# Altium PCB 175-00029 rev4, 486 CCD Interface.PcbDoc (part 1 of 2)
Units mil, origin at the board's own origin, x right, y up, seen from the top; angles counter-clockwise.
Board outline 2440.95 x 2610.24 mil, 4 copper layers (Top Layer (*.GTL), Internal Plane 1 (*.GP1), Mid-Layer 1  (*.G1), Bottom Layer (*.GBL)), stack 62.6 mil thick; 56 components, 48 nets, 263 pads, 206 vias.
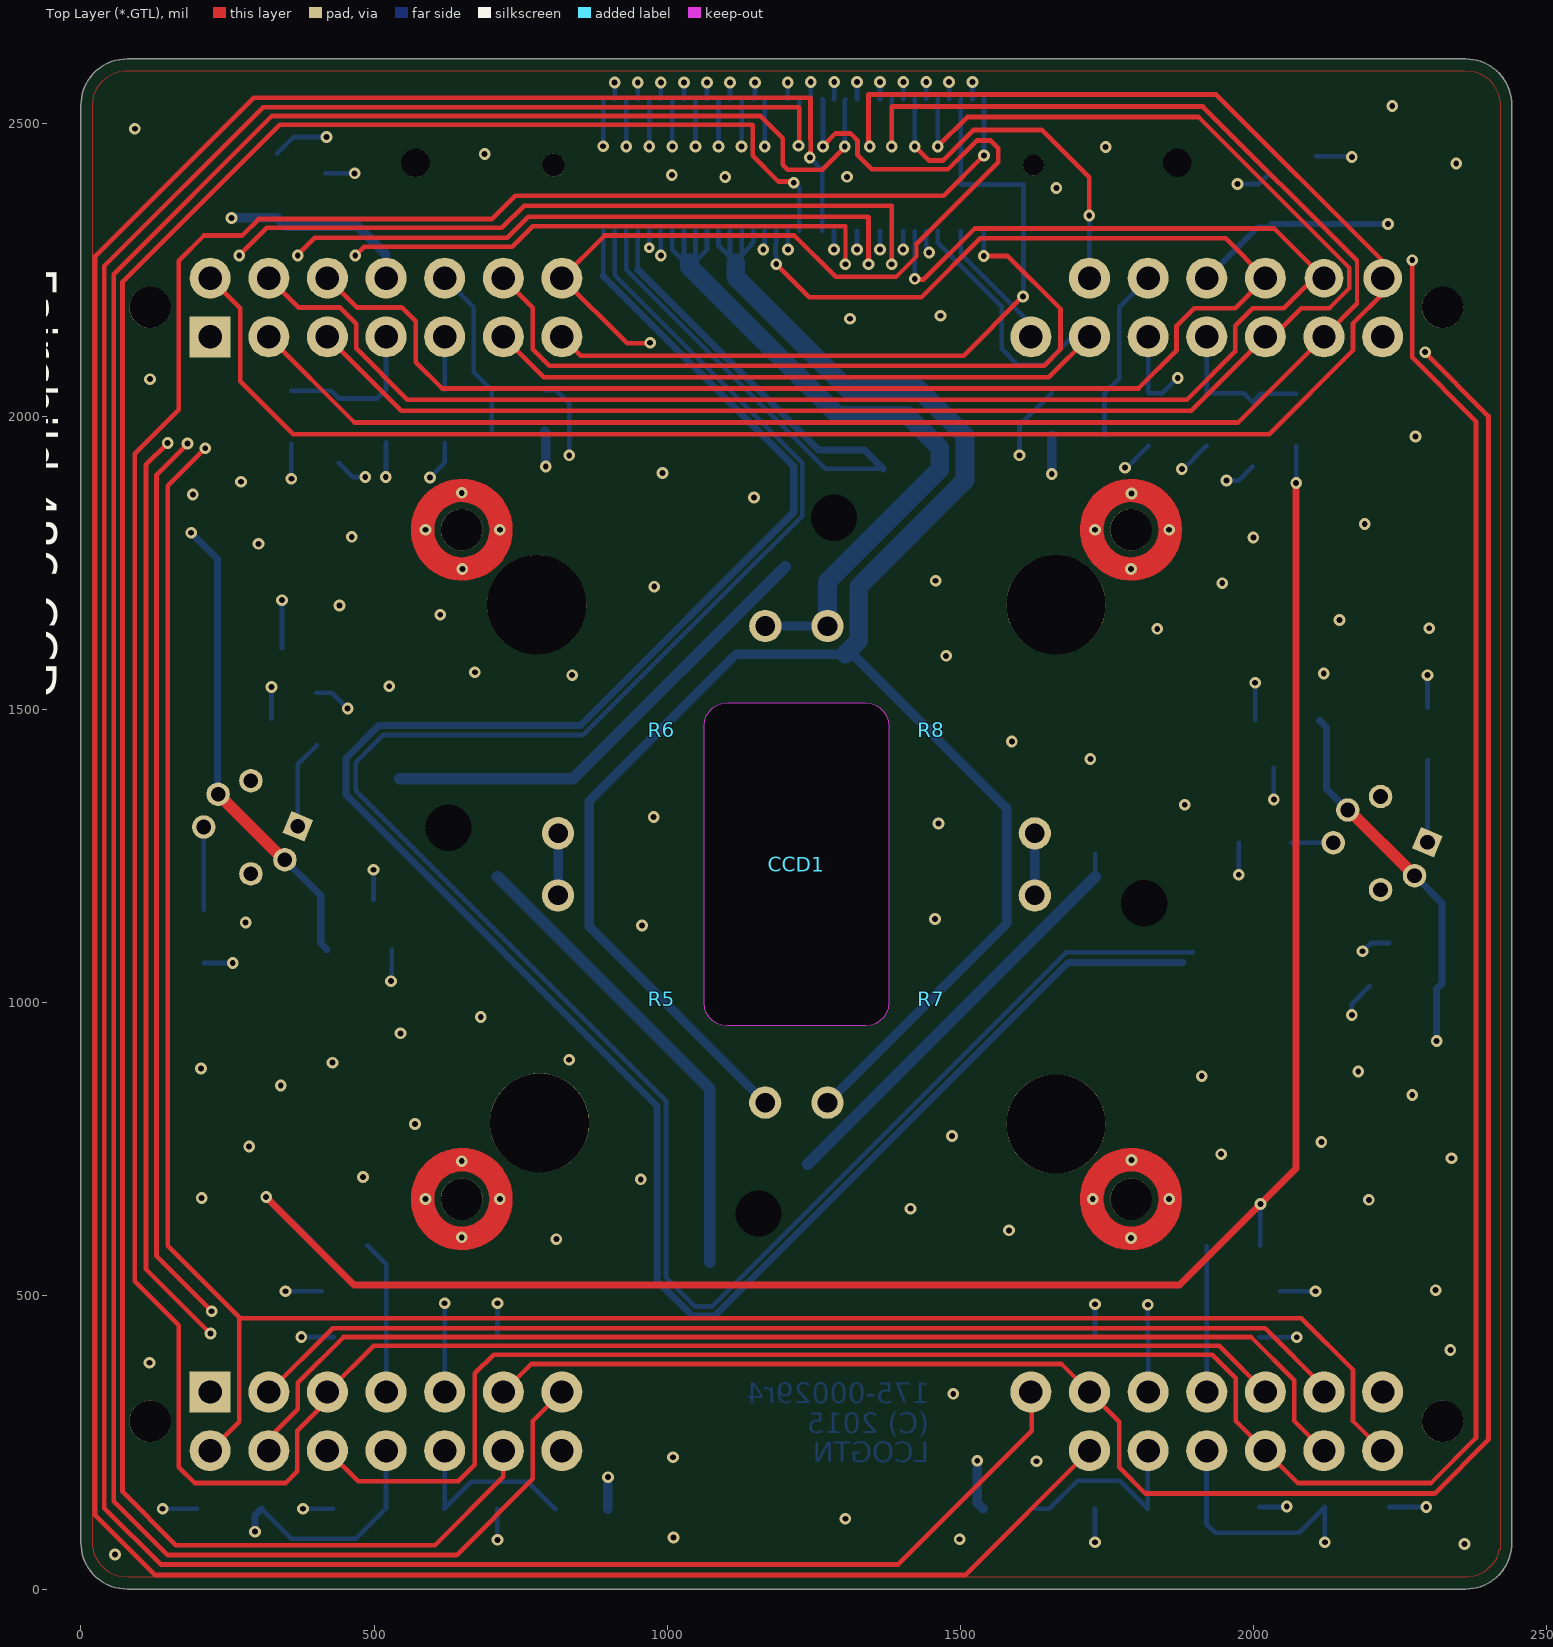
[diagram p0: Top Layer (*.GTL) view]
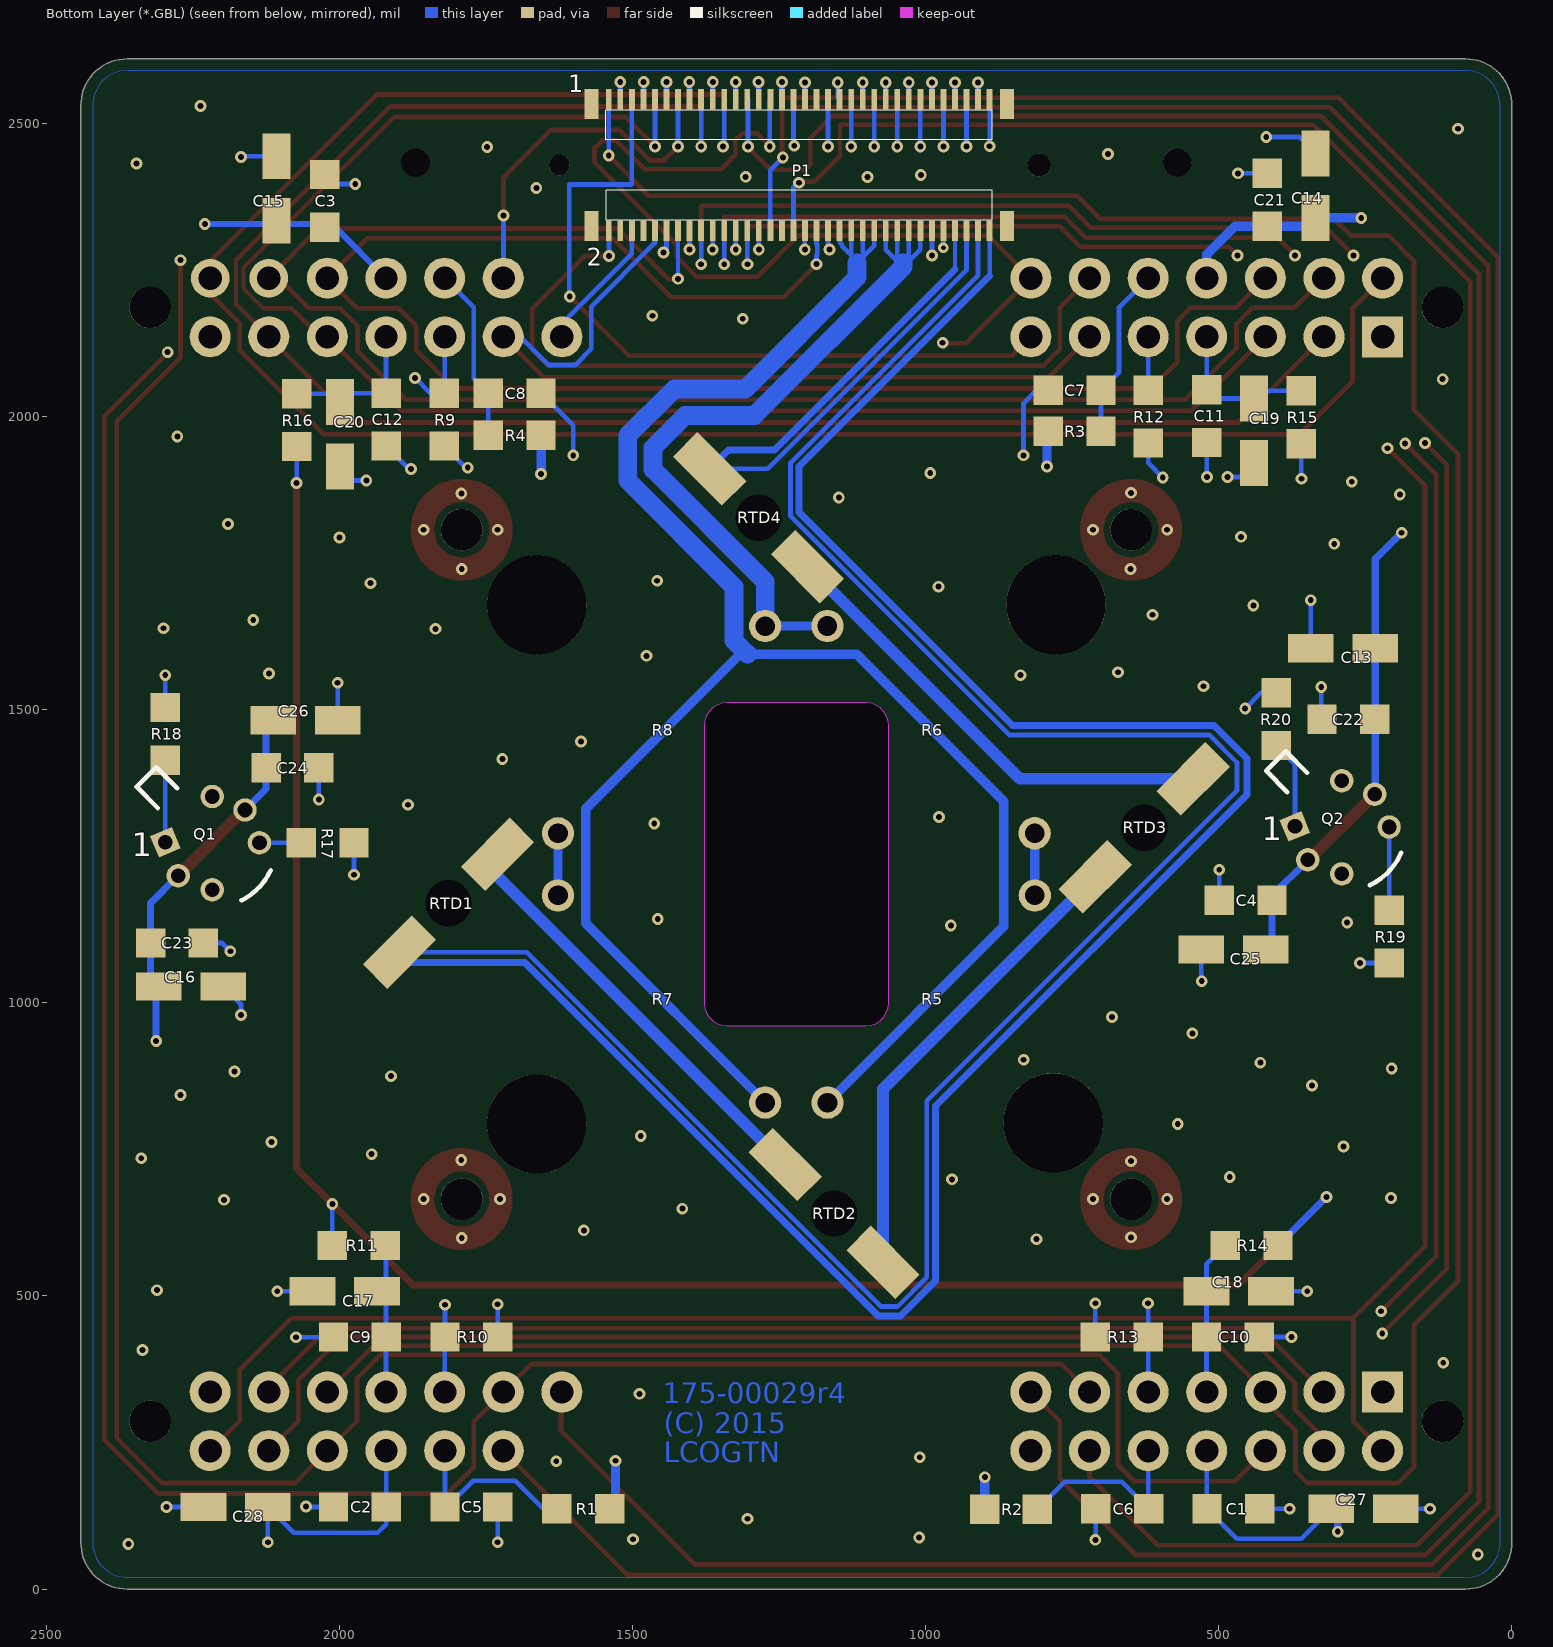
[diagram p1: Bottom Layer (*.GBL) view, seen from below]
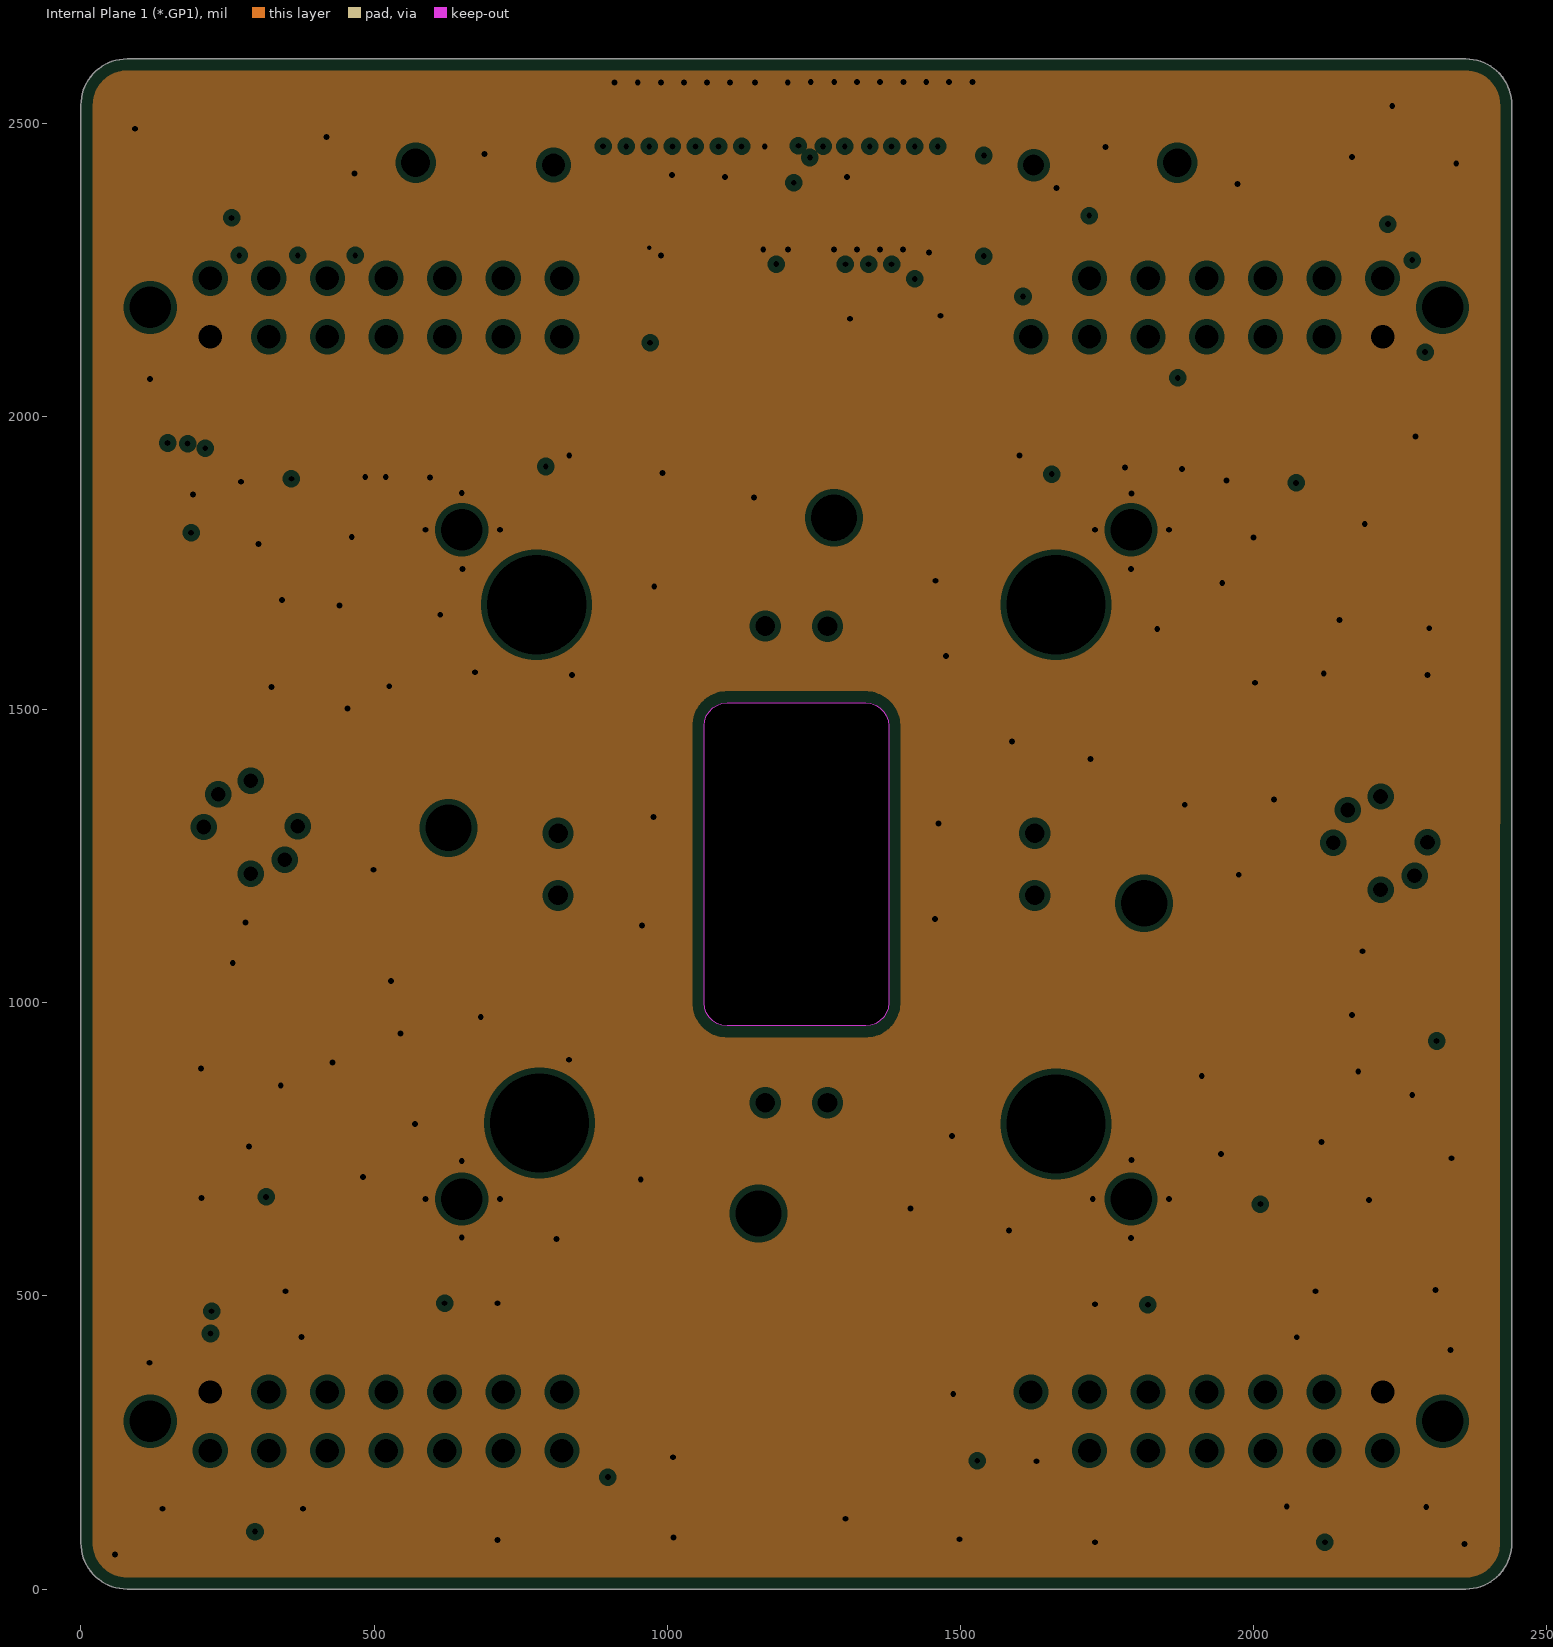
[diagram p2: Internal Plane 1 (*.GP1), clearances drawn from the general rule]
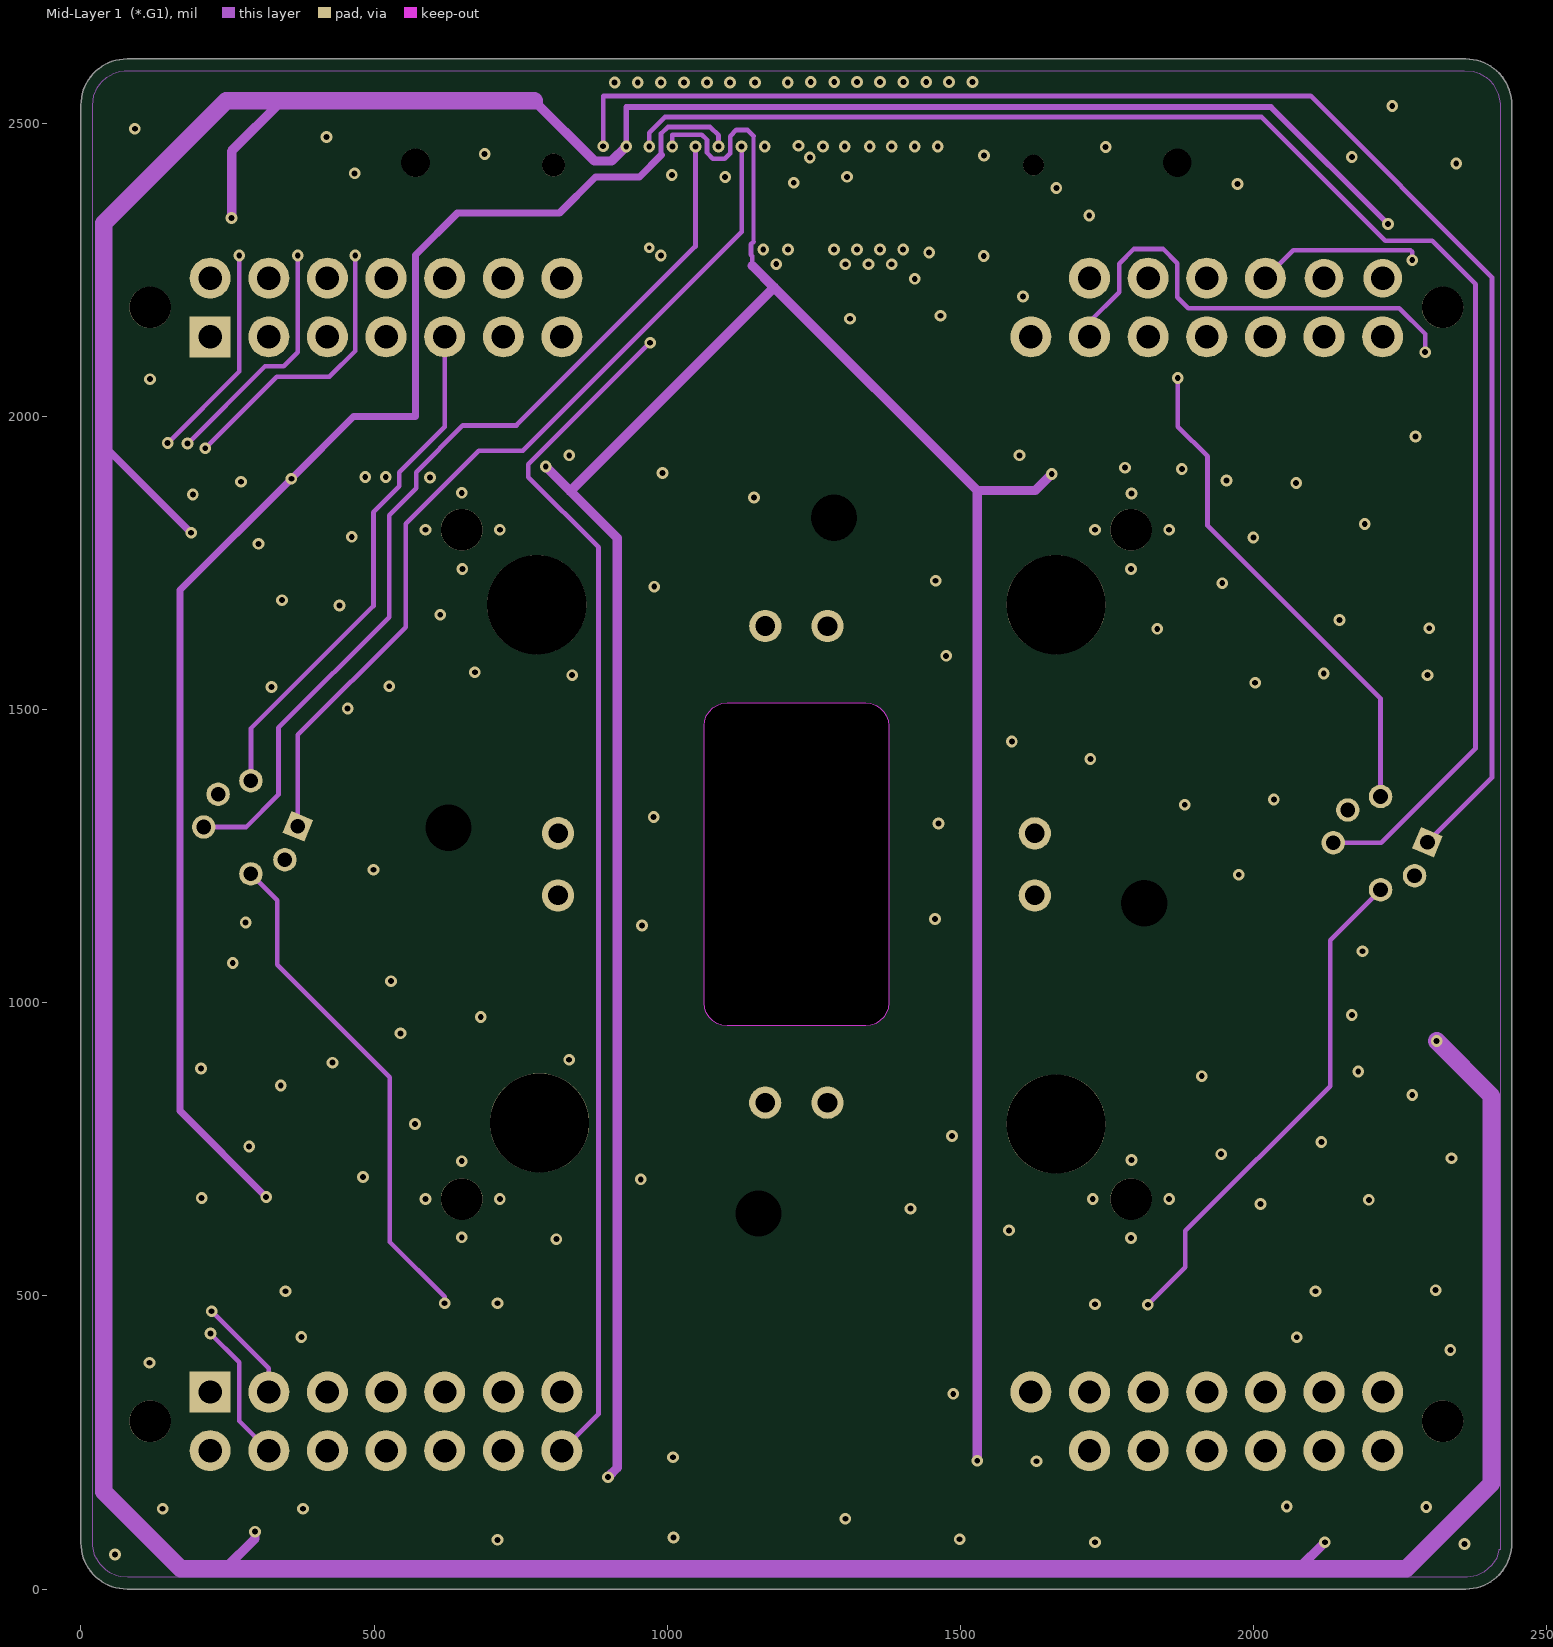
[diagram p3: Mid-Layer 1  (*.G1)]

## Layer stack, top to bottom
Top Layer (*.GTL): signal copper 1.4
Dielectric1: core 19, Polyimide, Dk 3.6
Internal Plane 1 (*.GP1): plane copper 1.4, net AGND
Dielectric2: prepreg 19, Polyimide, Dk 3.6
Mid-Layer 1  (*.G1): signal copper 1.4
Dielectric5: core 19, Polyimide, Dk 3.6
Bottom Layer (*.GBL): signal copper 1.4

## Board outline
0,78.74 ccw(c78.74,78.74) 78.74,0 2362.2,0 ccw(c2362.2,78.74) 2440.95,78.74 2440.94,78.74 2440.94,2531.5 ccw(c2362.2,2531.5) 2362.2,2610.24 78.74,2610.24 ccw(c78.74,2531.5) 0,2531.5
cut-out: 1102.28,1511.81 1338.5,1511.81 1347.26,1510.82 1355.59,1507.91 1363.05,1503.22 1369.28,1496.99 1373.98,1489.52 1376.89,1481.2 1377.87,1472.44 1377.87,1000 1376.89,991.24 1373.98,982.92 1369.28,975.45 1363.05,969.22 1355.59,964.53 1347.26,961.62 1338.5,960.63 1102.28,960.63 1093.52,961.62 1085.2,964.53 1077.74,969.22 1071.5,975.45 1066.81,982.92 1063.9,991.24 1062.91,1000 1062.91,1472.44 1063.9,1481.2 1066.81,1489.52 1071.5,1496.99 1077.74,1503.22 1085.2,1507.91 1093.52,1510.82

## Design rules (kind name [scope] priority, off if disabled: settings)
Clearance Clearance_14 [InNamedPolygon('TopGroundPour')] p1: gap=10
Clearance Clearance_13 [InNamedPolygon('TopGroundPour')] p2: gap=10
Clearance Clearance_12 [InNamedPolygon('TopGroundPour')] p3: gap=10
Clearance Clearance_11 [InNamedPolygon('TopGroundPour')] p4: gap=10
Clearance Clearance_10 [InNamedPolygon('TopGroundPour')] p5: gap=15
Clearance Clearance_9 [InNamedPolygon('Mid1GroundPour')] p6: gap=10
Clearance Clearance_8 [InNamedPolygon('Mid1GroundPour')] p7: gap=20
Clearance Clearance_7 [InNamedPolygon('Mid1GroundPour')] p8: gap=5
Clearance Clearance_6 [InNamedPolygon('Mid1GroundPour')] p9: gap=50
Clearance Clearance_5 [InNamedPolygon('Mid1GroundPour')] p10: gap=10
Clearance Clearance_4 [InNamedPolygon('Mid1GroundPour')] p11: gap=10
Clearance Clearance_3 [InNamedPolygon('Mid1GroundPour')] p12: gap=10
Clearance Clearance_2 [InNamedPolygon('BottomGroundPour')] p13: gap=10
Clearance Clearance_1 [InNamedPolygon('TopGroundPour')] p14: gap=10 except(20: Track-Fill)
Clearance "MSOP pad spacing" [(HasFootprint('TQFP48_m') or HasFootprint('RM-8'))] p15: gap=6
Clearance [All] p16: gap=7
ComponentClearance [(HasFootprint('AXIAL-0.5'))] p1: gap=-1000 collisioncheckmode=3 verticalgap=-1000 showdistances=TRUE
ComponentClearance "CCD Clearance" [(InComponent('CCD1')) vs (HasFootprint('AXIAL-0.5') OR HasFootprint('RTD 1x15mm'))] p2: gap=-39.37 collisioncheckmode=3 verticalgap=-1000 showdistances=FALSE
HoleSize [All] p1: absolutevalues=TRUE maxlimit=300 minlimit=1 maxpercent=80.000 minpercent=20.000
HoleSize Testpoint [All] p2: absolutevalues=TRUE maxlimit=100 minlimit=1 maxpercent=80.000 minpercent=20.000
HoleSize TestPointUsage [All] p3: absolutevalues=TRUE maxlimit=100 minlimit=1 maxpercent=80.000 minpercent=20.000
MinimumSolderMaskSliver [All] p1: minsoldermaskwidth=1
PlaneClearance [All] p1: clearance=10
PlaneConnect [(HasFootprint('Fairchild 486'))] p1: planeconnectstyle=Relief reliefexpansion=20 reliefentries=4 reliefconductorwidth=10 reliefairgap=10
PlaneConnect NoThermalVias [InNet('AGND')] p2: planeconnectstyle=Direct reliefexpansion=20 reliefentries=4 reliefconductorwidth=10 reliefairgap=10
PolygonConnect [All] p1: connectstyle=Relief reliefconductorwidth=10 reliefentries=4 polygonreliefangle="90 Angle" airgapwidth=10
RoutingVias [All] p1: holewidth=10 width=24 viastyle="Through Hole" minholewidth=10 minwidth=20 maxholewidth=25 maxwidth=50
RoutingVias "Dig 5V/Gnd via" [(InNet('+5') OR InNet('D'))] p2: holewidth=28 width=50 viastyle="Through Hole" minholewidth=28 minwidth=50 maxholewidth=28 maxwidth=50
SilkToSolderMaskClearance SilkscreenOverComponentPads [IsPad] p1: minsilkscreentomaskgap=3 clearancetoexposedcopper=TRUE
SolderMaskExpansion [All] p1: expansion=2
UnpouredPolygon [All] p1: allowunpoured=FALSE
Width Width_1 [All] p1: maxlimit=50 minlimit=5 preferedwidth=8
Width [All] p2: maxlimit=50 minlimit=5 preferedwidth=10
Width "+5V/DGND trace" [(InNet('+5') OR InNet('D'))] p3: maxlimit=50 minlimit=10 preferedwidth=50 midlayer1_minwidth=50 bottomlayer_minwidth=50 minimp=50.000000 maximp=50.000000 favimp=50.000000
23 further rules are at their usual default settings.

## Components (designator, comment, footprint, x,y, rotation, side; value= is the part's Value field where it differs from the comment)
C1 "Cap SMD" SMD_0805#1 475,137 r0 bottom
C2 "Cap SMD" SMD_0805#1 1965,140 r180 bottom
C3 "Cap SMD" SMD_0805#1 2025,2368 r270 bottom
C4 "Cap SMD" SMD_0805#1 454.15,1175 r180 bottom
C5 "Cap SMD" SMD_0805#1 1775,140 r0 bottom
C6 "Cap SMD" SMD_0805#2 665,137 r180 bottom
C7 "Cap SMD" SMD_0805#1 746,2045 r180 bottom
C8 "Cap SMD" SMD_0805#1 1701,2040 r0 bottom
C9 "Cap SMD" SMD_0805#1 1965,430 r180 bottom
C10 "Cap SMD" SMD_0805#1 476,430 r0 bottom
C11 "Cap SMD" SMD_0805#1 520.49,2001 r90 bottom
C12 "Cap SMD" SMD_0805#1 1920,1995 r90 bottom
C13 "35V" SMD_CAP_3216 288,1605 r180 bottom
C14 "35V" SMD_CAP_3216 335,2394 r270 bottom
C15 "35V" SMD_CAP_3216 2107,2389 r270 bottom
C16 "35V" SMD_CAP_3216 2253,1028 r0 bottom
C17 "35V" SMD_CAP_3216 1991,508.09 r180 bottom
C18 "35V" SMD_CAP_3216 466,508.09 r0 bottom
C19 "35V" SMD_CAP_3216 440,1976 r90 bottom
C20 "35V" SMD_CAP_3216 1999,1970 r90 bottom
C21 "" SMD_0805#1 417,2370 r270 bottom
C22 "" SMD_0805#1 279,1484 r180 bottom
C23 "Cap SMD" SMD_0805#1 2277,1102 r0 bottom
C24 "Cap SMD" SMD_0805#1 2080,1401 r0 bottom
C25 "35V" SMD_CAP_3216 475,1091 r180 bottom
C26 "35V" SMD_CAP_3216 2058,1482 r0 bottom
C27 "35V" SMD_CAP_3216 253,137 r0 bottom
C28 "35V" SMD_CAP_3216 2177,140 r180 bottom
CCD1 "Fairchild 486 CCD" "Fairchild 486" 220.49,2136.22 r270 top locked
P1 "FX11LA-68S" ? 1625.08,2429.13 r180 bottom locked
Q1 "IFN860" TO-71 2217,1273 r180 bottom locked
Q2 "IFN860" TO-71 290,1300 r180 bottom locked
R1 "Res SMD" SMD_0805#1 1584,137 r180 bottom
R2 "Res SMD" SMD_0805#3 854,136 r0 bottom
R3 "Res SMD" SMD_0805#1 746,1975 r0 bottom
R4 "Res SMD" SMD_0805#1 1701,1968 r180 bottom
R5 "Res TH" AXIAL-0.5 990.55,1006.5 r135 top
R6 "Res TH" AXIAL-0.5 990.75,1466.14 r225 top
R7 "Res TH" AXIAL-0.5 1450.39,1006.5 r225 top
R8 "Res TH" AXIAL-0.5 1450.39,1465.94 r135 top
R9 "Res SMD" SMD_0805#1 1821,1994.92 r90 bottom
R10 "Res SMD" SMD_0805#1 1775,430 r0 bottom
R11 "Res SMD" SMD_0805#1 1967,586 r180 bottom
R12 "Res SMD" SMD_0805#1 620.49,2000 r90 bottom
R13 "Res SMD" SMD_0805#1 665.5,430 r180 bottom
R14 "Res SMD" SMD_0805#1 444,586 r0 bottom
R15 "Res SMD" SMD_0805#1 359,1999 r90 bottom
R16 "Res SMD" SMD_0805#1 2073.02,1994 r90 bottom
R17 "Res SMD" SMD_0805#1 2020,1273 r180 bottom
R18 "Res SMD" SMD_0805#1 2297,1459 r90 bottom
R19 "Res SMD" SMD_0805#1 209.38,1113 r270 bottom
R20 "Res SMD" SMD_0805#1 402,1484 r90 bottom
RTD1 "RTD 2-wire, 1x15mm" "RTD 1x15mm" 1549.29,905.43 r225 bottom locked
RTD2 "RTD 2-wire, 1x15mm" "RTD 1x15mm" 891.65,905.43 r135 bottom locked
RTD3 "RTD 2-wire, 1x15mm" "RTD 1x15mm" 891.65,1563.07 r45 bottom locked
RTD4 "RTD 2-wire, 1x15mm" "RTD 1x15mm" 1549.29,1563.07 r315 bottom

## Footprints (in the part's own frame and the unit in brackets; to place one, negate y for a bottom-side part, rotate by r counter-clockwise, add the part's x,y. Pads: shape width x height; smd on the part's side, far side on the other; paste and mask are expansions set on the pad)
AXIAL-0.5 [mm] "Axial Device, Thru-Hole; 2 Leads; 0.5 in Pin Spacing"
  round 1.4 hole 0.85: 1(-6.35,0) 2(6.35,0)
"Fairchild 486" [mil] "486 CCD"
  round 70 hole 40: A1(1900,0) A2(1900,100) A3(1900,200) A4(1900,300) A5(1900,400) A6(1900,500) A7(1900,600) A16(1900,1500) A17(1900,1600) A18(1900,1700) A19(1900,1800) A20(1900,1900) A21(1900,2000) B2(1800,100) B3(1800,200) B4(1800,300) B5(1800,400) B6(1800,500) B7(1800,600) B15(1800,1400) B16(1800,1500) B17(1800,1600) B18(1800,1700) B19(1800,1800) B20(1800,1900) B21(1800,2000) C2(0,100) C3(0,200) C4(0,300) C5(0,400) C6(0,500) C7(0,600) C15(0,1400) C16(0,1500) C17(0,1600) C18(0,1700) C19(0,1800) C20(0,1900) C21(0,2000) D1(-100,0) D2(-100,100) D3(-100,200) D4(-100,300) D5(-100,400) D6(-100,500) D7(-100,600) D16(-100,1500) D17(-100,1600) D18(-100,1700) D19(-100,1800)
  rect 70x70 hole 40: B1(1800,0) C1(0,0)
  round 66 hole 40: D20(-100,1900) D21(-100,2000)
"RTD 1x15mm" [mm] "RTD"
  round 1.778 hole 2 unplated: 0(-9.5,0)
  rect 1.5x3 smd: 1(-9.5,3) 2(-9.5,-3)
SMD_0805#1 [mil]
  rect 50x50 smd: 1(-45,0) 2(45,0)
SMD_0805#2 [mil]
  rect 50x50 smd: 1(-45,0) 2(45.49,0)
SMD_0805#3 [mil]
  rect 50x50 smd: 1(-44.51,0) 2(45,0)
SMD_CAP_3216 [mil]
  rect 78x48 smd: 1(55,0) 2(-55,0)
TO-71 [mil] "Can; 7 Leads (1 Absent); Pin Circle Dia. 2.54 mm; Lead Dia. 0.48 mm (max)"
  rect 40x40 hole 25 rot 22.5: 1(-80,1)
  round 40 hole 25: 2(-58,-56) 3(0,-80) 5(80.62,0) 6(56,56) 7(0,79)
  silkscreen extent -129,-98 100,129
? [mm] "HIROSE RECEPTACLE 68 PIN"
  round 0.9 hole 0.9 unplated: 0(0,0)
  rect 0.6x1.3 smd: 0(1.4,-2.65) 0(1.4,2.65) 0(19.4,-2.65) 0(19.4,2.65)
  round 1 hole 1 unplated: 0(20.8,0)
  rect 0.25x0.9 smd: 1(2.15,2.85) 1(2.15,2.85) 2(2.15,-2.85) 3(2.65,2.85) 4(2.65,-2.85) 5(3.15,2.85) 6(3.15,-2.85) 7(3.65,2.85) 8(3.65,-2.85) 9(4.15,2.85) 10(4.15,-2.85) 11(4.65,2.85) 12(4.65,-2.85) 13(5.15,2.85) 14(5.15,-2.85) 15(5.65,2.85) 16(5.65,-2.85) 17(6.15,2.85) 18(6.15,-2.85) 19(6.65,2.85) 20(6.65,-2.85) 21(7.15,2.85) 22(7.15,-2.85) 23(7.65,2.85) 24(7.65,-2.85) 25(8.15,2.85) 26(8.15,-2.85) 27(8.65,2.85) 28(8.65,-2.85) 29(9.15,2.85) 30(9.15,-2.85) 31(9.65,2.85) 32(9.65,-2.85) 33(10.15,2.85) 34(10.15,-2.85) 35(10.65,2.85) 36(10.65,-2.85) 37(11.15,2.85) 38(11.15,-2.85) 39(11.65,2.85) 40(11.65,-2.85) 41(12.15,2.85) 42(12.15,-2.85) 43(12.65,2.85) 44(12.65,-2.85) 45(13.15,2.85) 46(13.15,-2.85) 47(13.65,2.85) 48(13.65,-2.85) 49(14.15,2.85) 50(14.15,-2.85) 51(14.65,2.85) 52(14.65,-2.85) 53(15.15,2.85) 54(15.15,-2.85) 55(15.65,2.85) 56(15.65,-2.85) 57(16.15,2.85) 58(16.15,-2.85) 59(16.65,2.85) 60(16.65,-2.85) 61(17.15,2.85) 62(17.15,-2.85) 63(17.65,2.85) 64(17.65,-2.85) 65(18.15,2.85) 66(18.15,-2.85) 67(18.65,2.85) 68(18.65,-2.85)

## Part data
C1 C2 C3 C4 C5 C6 C7 C8 C9 C10 C11 C12 C23 C24: "Capacitor"
C13 C14 C15 C16 C17 C18 C19 C20 C25 C26 C27 C28: library part "Cap 2.2uF 35V Low ESR", "outline 3.2mm x 1.6 mm, 1206"
C21 C22: library part "Cap SMD", "Capacitor"
P1: "HIROSE 68P Receptacle"
Q1 Q2: "N-JFET NJ450L Process"
R1 R2 R3 R4 R9 R10 R11 R12 R13 R14 R15 R16 R17 R18 R19 R20: "Resistor 0805"
R5 R6 R7 R8: "Resistor"
RTD1 RTD2 RTD3 RTD4: "Pt RTD"

## Free pads (board coordinates)
  round 70.87 hole 70.87 unplated: 1(118.11,286.22) 1(118.11,2186.22) 1(649.61,665.35) 1(649.61,1807.09) 1(1791.34,665.35) 1(1791.34,1807.09) 1(2322.83,2186.22) 2(2322.83,286.22)
  round 48.07 hole 49.21 unplated: 1(570.87,2433.07)
  round 169.29 hole 169.29 unplated: 1(777.56,1679.13) 1(782.4,795.28) 1(1663.39,793.31) 1(1663.39,1679.13)
  round 47.24 hole 49.21 unplated: 1(1870.08,2433.07)

## Via types
v1: diameter 20, hole 10, Top Layer (*.GTL) to Bottom Layer (*.GBL), 205 vias
v2: diameter 18, hole 8, Top Layer (*.GTL) to Bottom Layer (*.GBL), 1 vias

## Nets (pads, with @x,y where several pads share a name; then routed paths per layer and width w, separated by ;. In a path a pad name is that pad's centre, name@x,y a point inside that pad or via, vN(x,y) a via of type N, cw(c..) or ccw(c..) an arc to the next point about the centre after c; other vN are vias at no path point)
A1OUT: P1.67 Q1.1 R18.1 | length 2960
  Mid-Layer 1  (*.G1) w8: v1(890.83,2461.17) 891,2461 891,2547 2098,2547 2407,2238 2407,1384 Q1.1@2297,1274
  Bottom Layer (*.GBL) w8: v1(890.83,2461.17) P1.67@890.83,2541.34 ; Q1.1@2297,1274 R18.1@2297,1414
A2OUT: P1.43 Q2.1 R20.1 | length 1749.1
  Mid-Layer 1  (*.G1) w8: Q2.1@370,1301 370,1457 554,1641 554,1817 679,1942 754,1942 1127.05,2315.05 v1(1127.05,2461)
  Bottom Layer (*.GBL) w8: Q2.1@370,1301 370,1407 R20.1@402,1439 ; v1(1127.05,2461) P1.43@1127.05,2541.34
A3OUT: P1.51 Q2.5 R19.1 | length 1823.8
  Mid-Layer 1  (*.G1) w8: Q2.5@209.38,1300 282,1300 337,1355 337,1469 526,1658 526,1832 572,1878 572,1905.34 651.66,1985 743,1985 1048.31,2290.31 v1@1048.31,2457.94
  Bottom Layer (*.GBL) w8: R19.1@209.38,1158 Q2.5@209.38,1300 ; v1(1048.31,2461) P1.51@1048.31,2541.34
A4OUT: P1.59 Q1.5 R17.1 | length 2814.8
  Mid-Layer 1  (*.G1) w8: v1(969.57,2461) 969.57,2484.28 996.29,2511 2014,2511 2225,2300 2304.97,2300 2379,2225.97 2379,1434 2218,1273 Q1.5@2136.38,1273
  Bottom Layer (*.GBL) w8: v1(969.57,2461) P1.59@969.57,2541.34 ; R17.1@2065,1273 Q1.5@2136.38,1273
AGND: C1.1 C2.1 C3.1 C4.1 C5.1 C6.1 C7.1 C8.1 C9.1 C10.1 C11.1 C12.1 C13.2 C14.2 C15.2 C16.2 C17.2 C18.2 C19.2 C20.2 C21.1 C22.1 C23.1 C24.1 C25.2 C26.2 C27.2 C28.2 CCD1.B1 CCD1.B21 CCD1.C1 CCD1.C21 P1.3 P1.7 P1.11 P1.12 P1.15 P1.16 P1.19 P1.20 P1.23 P1.24 P1.27 P1.28 P1.31 P1.35 P1.36 P1.39 P1.40 P1.41 P1.45 P1.49 P1.53 P1.57 P1.58 P1.60 P1.61 P1.65 R9.1 R10.1 R12.1 R13.1 R17.2 R18.2 R19.2 R20.2 | length 4801.4
  Top Layer (*.GTL) w40: v1@716.61,665.35 ccw(c649.61,665.35) v1@716.61,665.35 ; v1@716.61,1807.09 ccw(c649.61,1807.09) v1@716.61,1807.09 ; v1@1858.34,665.35 ccw(c1791.34,665.35) v1@1858.34,665.35 ; v1@1858.34,1807.09 ccw(c1791.34,1807.09) v1@1858.34,1807.09
  Bottom Layer (*.GBL) w8: v1(139.49,137) C27.2@198,137 ; R19.2@209.38,1068 v1(259,1068) ; C22.1@325.15,1485.15 v1(325.15,1539) ; C14.2@335,2449 363,2477 v1(419,2477) ; C13.2@343,1605 v1(343,1687) ; v1(349.03,508.09) C18.2@411,508.09 ; v1(376,430) C10.1@431,430 ; v1(379,137) C1.1@430,137 ; R20.2@402,1529 428,1529 v1(455,1502) ; C21.1@417,2415 v1(467,2415) ; C19.2@440,1921 464,1897 v1(485,1897) ; C4.1@499.15,1175 v1(499.15,1227.15) ; v1(520,1897) 520.49,1897.49 C11.1@520.49,1956 ; v1(529,1037) 530,1038 C25.2@530,1091 ; v1(595.49,1896) 620.49,1921 R12.1@620.49,1955 ; v1@710,84.5 C6.1@710,137 ; R13.1@710.5,430 v1(710.5,487.5) ; C7.1@791,2045 811,2045 833,2023 v1(833,1934) ; P1.65@910.51,2541.34 v1(910.51,2570) ; P1.61@949.88,2541.34 v1(949.88,2570) ; v2(969.57,2288) P1.60@969.57,2316.93 ; v1(989.25,2275) P1.58@989.25,2316.93 ; P1.57@989.25,2541.34 v1(989.25,2570) ; P1.53@1028.62,2541.34 v1(1028.62,2570) ; P1.49@1067.99,2541.34 v1(1067.99,2570) ; P1.45@1107.36,2541.34 v1(1107.36,2570) ; P1.41@1146.73,2541.34 1150,2544.61 v1(1150,2570) ; v1(1164,2285) 1166.42,2287.42 P1.40@1166.42,2316.93 ; v1(1166.42,2461) P1.39@1166.42,2541.34 ; P1.36@1205.79,2316.93 1206,2316.72 v1(1206,2285) ; P1.35@1205.79,2541.34 v1(1205.79,2570) ; v1(1245,2571) 1245,2541.5 P1.31@1245.16,2541.34 ; v1(1284.53,2285) P1.28@1284.53,2316.93 ; P1.27@1284.53,2541.34 1285,2541.81 v1(1285,2571) ; v1(1323.9,2285) P1.24@1323.9,2316.93 ; P1.23@1323.9,2541.34 1324,2541.44 v1(1324,2571) ; v1(1363.27,2285) P1.20@1363.27,2316.93 ; P1.19@1363.27,2541.34 v1@1363.27,2570 ; v1(1402.64,2285) P1.16@1402.64,2316.93 ; P1.15@1402.64,2541.34 v1@1402.64,2570 ; v1@1402.64,2569.64 1403,2570 v1(1403,2571) ; P1.12@1442.01,2316.93 1442.01,2284.99 v1(1447,2280) ; P1.11@1442,2541.35 v1(1442,2571) ; v1(1481,2571) 1481,2541.72 P1.7@1481.38,2541.34 ; P1.3@1520.75,2541.34 v1@1520.75,2570 ; v1(1601,1934) 1601,1985 C8.1@1656,2040 ; v1(1730,80) C5.1@1730,137 ; R10.1@1730,430 v1(1730,486) ; v1(1781,1913) 1784.08,1913 R9.1@1821,1949.92 ; v1(1878,1910.53) 1880.53,1910.53 C12.1@1920,1950 ; v1(1954,1891) 1975,1891 C20.2@1999,1915 ; v1(1973,2397) 2009,2397 C3.1@2025,2413 ; v1(1975,1218.47) R17.2@1975,1273 ; C26.2@2003,1482 v1(2003,1546.17) ; C2.1@2010,140 2056.08,140 v1(2057,140.92) ; C9.1@2010,430 2010.49,429.51 v1(2074,429.51) ; v1(2035,1347) C24.1@2035,1401 ; C17.2@2046,508.09 v1(2106.09,508.09) ; C15.2@2107,2444 2167,2444 v1(2168,2443) ; v1(2168,979.19) 2168,998 C16.2@2198,1028 ; v1(2186,1088) 2200,1102 C23.1@2232,1102 ; C28.2@2232,140 v1(2295,140) ; R18.2@2297,1504 v1(2297,1559)
  other v1: 58,59 2360,77 710.5,84 1499,85 1011,88 1304,120 1630,218 1010,225 1488,333 117,386 2336,408 2311,510 811,597 1791.34,599 649.61,600 1583,612 1415,649 2197,664 588,665.35 714.61,665.35 1726,665.35 1856.34,665.35 206,667 955,699 481.15,703 649.61,730 1792.15,732 2338,735 1945,742 287,755 2116,762.6 1486,773 570,793.31 2271,843 341,859 1912,875 2179,883 205,888 429,898 832.83,903 545,948 682,976 957,1132 281,1137 1457,1143 1463,1306 977,1317 1883,1338 1722,1416 1588,1446 526,1540 838,1559 2120,1562 672,1564 1476,1592 1836,1638 2300,1639 2147,1653 613,1662 441,1678 978,1710 1947,1716 1458,1720 650.64,1740 1791.34,1740 303,1783 2000,1794 462,1795 588,1807.09 714.61,1807.09 1730,1807.09 1856.34,1807.09 2190,1817 1148,1862 191,1867 1792,1869 649.61,1870 273,1889 992,1904 2276.44,1966 118,2064 1312,2167 1466.17,2172 1664,2390 1099,2408.68 1307,2409 1008.09,2412.06 2346,2432 688.77,2448 1748,2460 92,2491 2237,2530 1363,2571 1521,2571
HEATER(+): P1.50 P1.52 P1.54 P1.56 R6.1 R8.2 | length 1302.8
  Bottom Layer (*.GBL) w8: P1.56@1008.94,2316.93 1008.94,2285.06 1028.62,2265.38 ; P1.54@1028.62,2316.93 1028.62,2265.38 ; 1035,2259 1028.62,2265.38 ; 1038,2262 1048.31,2272.31 P1.52@1048.31,2316.93 ; 1038.93,2256 1067.99,2285.06 P1.50@1067.99,2316.93
  Bottom Layer (*.GBL) w16: R6.1@1167.52,1642.92 R8.2@1273.42,1642.92
  Bottom Layer (*.GBL) w32: 1038,2262 1038,2256 1292,2002 1410,2002 1465,1947 1465,1910 1273.42,1718.42 R8.2@1273.42,1642.92
HEATER(-): P1.42 P1.44 P1.46 P1.48 R5.1 R7.2 | length 3398.2
  Bottom Layer (*.GBL) w8: P1.48@1087.68,2316.93 1087.68,2291.32 1107.36,2271.64 ; P1.46@1107.36,2316.93 1107.36,2271.64 ; P1.44@1127.05,2316.93 1127.05,2272.05 ; P1.42@1146.73,2316.93 1146.73,2297.43 1143,2293.7 1143,2291.28 1127.05,2275.33 1127.05,2272.05 ; 1107.36,2271.64 1117,2262 1127.05,2272.05
  Bottom Layer (*.GBL) w16: R5.1@1167.33,829.72 867,1130.05 867,1344.16 1117.84,1595 1303.9,1595 ; R7.2@1273.62,829.72 1579.45,1135.55 1579.45,1331.77 1310.06,1601.16
  Bottom Layer (*.GBL) w32: 1117,2262 1117,2238 1308,2047 1429,2047 1508,1968 1508,1891 1327,1710 1327,1618.1 1303.9,1595
NetR5_2: R5.2 R6.2 | length 105.9
  Bottom Layer (*.GBL) w16: R5.2@813.97,1183.47 R6.2@813.97,1289.37
NetR7_1: R7.1 R8.1 | length 105.9
  Bottom Layer (*.GBL) w16: R7.1@1627.17,1183.27 R8.1@1627.17,1289.17
NetRTD1_1: RTD1.1 RTD2.1 | length 732.2
  Bottom Layer (*.GBL) w8: RTD1.1@1730.24,1215.09 RTD1.1@1730.24,1253.42
  Bottom Layer (*.GBL) w20: RTD2.1@1239.64,724.48 RTD1.1@1730.24,1215.09
NetRTD2_2: RTD2.2 RTD3.1 | length 807.5
  Bottom Layer (*.GBL) w20: RTD3.1@710.7,1215.09 1072.61,853.18 RTD2.2@1072.61,557.45
NetRTD3_2: RTD3.2 RTD4.1 | length 807.5
  Bottom Layer (*.GBL) w20: RTD3.2@543.67,1382.12 839.4,1382.12 RTD4.1@1201.31,1744.02
OG_LL: C5.2 CCD1.A17 R1.1 | length 329.5
  Bottom Layer (*.GBL) w8: R1.1@1629,137 1652,137 1700,185 1772,185 1820,137 C5.2@1820,140 CCD1.A17@1820,235.73
OG_LR: C6.2 CCD1.A5 R2.1 | length 326.7
  Bottom Layer (*.GBL) w8: C6.2@619.51,137 C6.2@620.49,137.98 ; CCD1.A5@620.49,236.22 C6.2@620.49,137.98 ; R2.1@809.49,136 762.49,183 665.51,183 C6.2@620.49,137.98
OG_UL: C8.2 CCD1.D17 R4.1 | length 299.1
  Bottom Layer (*.GBL) w8: R4.1@1746,1968 C8.2@1746,2040 1771,2065 1771,2186.73 CCD1.D17@1820.49,2236.22
OG_UR: C7.2 CCD1.D5 R3.1 | length 294.6
  Bottom Layer (*.GBL) w8: CCD1.D5@620.49,2236.22 670,2186.71 670,2076 C7.2@701,2045 R3.1@701,1975
OS_LL: CCD1.B17 Q1.3 R10.2 | length 1020.7
  Mid-Layer 1  (*.G1) w8: v1(1820,485) 1884,549 1884,611 2131,858 2131,1107 Q1.3@2217,1193
  Bottom Layer (*.GBL) w8: R10.2@1820,430 v1(1820,485) ; CCD1.B17@1820.49,336.22 R10.2@1820.49,429.51
OS_LR: CCD1.B5 Q2.3 R13.2 | length 1020.7
  Mid-Layer 1  (*.G1) w8: Q2.3@290,1220 335,1175 335,1065 526.92,873.08 526.92,592.08 620.49,498.51 v1(620.49,487.5)
  Bottom Layer (*.GBL) w8: CCD1.B5@620.49,336.22 v1(620.49,487.5)
OS_UL: CCD1.C17 Q1.7 R9.2 | length 1013.9
  Mid-Layer 1  (*.G1) w8: v1(1871,2066) 1871,1983 1921.83,1932.17 1921.83,1814.27 2217,1519.1 Q1.7@2217,1352
  Bottom Layer (*.GBL) w8: R9.2@1820.49,2040.43 CCD1.C17@1820.49,2136.22 ; R9.2@1821,2039.92 1844.92,2039.92 v1(1871,2066)
OS_UR: CCD1.C5 Q2.7 R12.2 | length 985.3
  Mid-Layer 1  (*.G1) w8: Q2.7@290,1379 290,1468 499,1677 499,1837 543,1881 543,1905 620.49,1982.49 CCD1.C5@620.49,2136.22
  Bottom Layer (*.GBL) w8: R12.2@620.49,2045 CCD1.C5@620.49,2136.22
P1A: CCD1.A1 CCD1.A21 P1.26 | length 5369
  Top Layer (*.GTL) w7: v1(1304,2260) 1304,2325
  Top Layer (*.GTL) w8: v1(212,1946.09) 148,1882.09 148,586 270,464 270,285.73 CCD1.A1@220.49,236.22 ; 270,462 2081.92,462 2170,373.92 2170,286.71 CCD1.A21@2220.49,236.22 ; v1(468,2275) 483,2290 736,2290 771,2325 1304,2325
  Mid-Layer 1  (*.G1) w8: v1(212,1946.09) 333.91,2068 424,2068 468,2112 v1(468,2275)
  Bottom Layer (*.GBL) w7: v1@1304.21,2260.21 P1.26@1304.21,2316.93
  Bottom Layer (*.GBL) w8: v1(1304,2260) v1@1304.21,2260.21
P1B: CCD1.D1 CCD1.D21 P1.21 | length 3530.4
  Top Layer (*.GTL) w8: CCD1.D1@220.49,2236.22 271.73,2184.98 271.73,2060.27 362,1970 2027,1970 2170,2113 2170,2159 2220.49,2209.49 CCD1.D21@2220.49,2236.22 2220.49,2265.51 1936.58,2549.42 1343.58,2549.42 1343.58,2463 v1(1345.58,2461)
  Bottom Layer (*.GBL) w8: P1.21@1343.58,2541.34 1343.58,2463 v1(1345.58,2461)
P2A: CCD1.B2 CCD1.B20 P1.22 | length 5171.1
  Top Layer (*.GTL) w8: v1(182,1954) 129,1901 129,568 v1(223,474) ; CCD1.B2@320.49,336.22 429.27,445 2020,445 2120.49,344.51 CCD1.B20@2120.49,336.22 ; v1(370,2275) 370,2276 399,2305 727.08,2305 763.08,2341 1343.58,2341 v1(1343.58,2260)
  Mid-Layer 1  (*.G1) w8: v1(182,1954) 314,2086 346,2086 370,2110 v1(370,2275) ; v1(223,474) 320.49,376.51 CCD1.B2@320.49,336.22
  Bottom Layer (*.GBL) w8: v1(1343.58,2260) P1.22@1343.58,2316.93
P2B: CCD1.C2 CCD1.C20 P1.17 | length 3125.1
  Top Layer (*.GTL) w7: 2176.49,2218 2176.49,2254.45 ; 2176.58,2192.32 2176.58,2217.9 ; 2176.58,2254.54 2176.58,2266.42
  Top Layer (*.GTL) w8: CCD1.C2@320.49,2136.22 466.71,1990 1974.27,1990 CCD1.C20@2120.49,2136.22 2176.58,2192.32 ; v1(1382.95,2461) 1382.95,2529 1914,2529 2176.58,2266.42
  Bottom Layer (*.GBL) w8: v1(1382.95,2461) P1.17@1382.95,2541.34
P3A: CCD1.A2 CCD1.A20 P1.18 | length 5536.4
  Top Layer (*.GTL) w8: v1(148,1955) 111,1918 111,546 v1(221,436) ; v1(270,2275) 317,2322 718,2322 756,2360 1382.95,2360 v1(1382.95,2260) ; CCD1.A2@320.49,236.22 320.49,257.49 370,307 370,352 448,430 1996,430 2070,356 2070,286.71 CCD1.A20@2120.49,236.22
  Mid-Layer 1  (*.G1) w8: v1(148,1955) 270,2077 v1(270,2275) ; v1(221,436) 270,387 270,286.71 CCD1.A2@320.49,236.22
  Bottom Layer (*.GBL) w8: v1(1382.95,2260) P1.18@1382.95,2316.93
P3B: CCD1.D2 CCD1.D20 P1.14 | length 2875.6
  Top Layer (*.GTL) w8: CCD1.D2@320.49,2236.22 370.49,2186.22 441.78,2186.22 469.71,2158.29 469.71,2116.29 557,2029 1886.83,2029 1969,2111.17 1969,2155 1999,2185 2052,2185 2103.22,2236.22 CCD1.D20@2120.49,2236.22 2035.79,2320.92 1524.92,2320.92 1438,2234 1428.32,2234 v1@1422.32,2240
  Bottom Layer (*.GBL) w7: v1(1422.32,2235) P1.14@1422.32,2316.93
RD_LL: C9.2 C17.1 CCD1.B18 R11.2 | length 248.3
  Bottom Layer (*.GBL) w8: CCD1.B18@1920.49,336.22 R11.2@1920.49,584.49
RD_LR: C10.2 C18.1 CCD1.B4 R14.2 | length 262.5
  Bottom Layer (*.GBL) w8: R14.2@489,586 521,554 C18.1@521,508.09 521,430 CCD1.B4@521,336.73
RD_UL: C12.2 C20.1 CCD1.C18 R16.2 | length 260.8
  Bottom Layer (*.GBL) w8: C12.2@1920,2040 1984,2040 C20.1@1999,2025 2013,2039 R16.2@2073.02,2039 ; C12.2@1920.49,2040.49 CCD1.C18@1920.49,2136.22
RD_UR: C11.2 C19.1 CCD1.C4 R15.2 | length 263.3
  Bottom Layer (*.GBL) w8: R15.2@359,2044 427,2044 C19.1@440,2031 505.49,2031 C11.2@520.49,2046 CCD1.C4@520.49,2136.22
RG: CCD1.A3 CCD1.A19 CCD1.D3 CCD1.D19 P1.38 | length 7473.7
  Top Layer (*.GTL) w8: CCD1.A3@420.49,236.22 472.71,184 644,184 672,212 672,368 704,400 1930,400 1970,360 1970,286.71 CCD1.A19@2020.49,236.22 2075.71,181 2303,181 2379.73,257.73 2379.73,1992.27 2271,2101 v1(2271,2267) ; CCD1.D3@420.49,2236.22 470.49,2186.22 547.49,2186.22 571,2162.71 571,2093 616,2048 1804,2048 1869,2113 1869,2155 1899,2185 1969.27,2185 CCD1.D19@2020.49,2236.22 1952.65,2304.06 1534.06,2304.06 1433.92,2203.92 1242.28,2203.92 v1(1186.1,2260.1)
  Mid-Layer 1  (*.G1) w8: CCD1.D19@2020.49,2236.22 2068.27,2284 2268,2284 2271,2281 v1(2271,2267)
  Bottom Layer (*.GBL) w8: v1@1186,2260 v1(1186.1,2260.1) 1186.1,2274.99 1186.21,2275.09 1185,2276.3 1185,2293.7 1186.21,2294.91 1186.1,2295.01 P1.38@1186.1,2316.93
RTDF(+): P1.62 P1.64 RTD4.2 | length 1270.4
  Bottom Layer (*.GBL) w7: 949.88,2251.17 P1.62@949.88,2316.93
  Bottom Layer (*.GBL) w8: P1.64@930.2,2316.93 930.2,2250.2 1269.34,1911.06 RTD4.2@1368.34,1911.06
  Bottom Layer (*.GBL) w12: 949.88,2251.17 1258.06,1943 1336.4,1943 RTD4.2@1368.34,1911.06
RTDF(-): P1.66 P1.68 RTD1.2 | length 7657.1
  Bottom Layer (*.GBL) w8: 890.83,2240.17 P1.68@890.83,2316.93 ; P1.66@910.51,2316.93 910.51,2241.49 1230.42,1921.58 1230.42,1830.42 1217.66,1817.66 1127.67,1727.7 ; 1127.67,1727.67 857,1457 516,1457 469,1410 469,1362.05 998,833.05 998,532 1048,482 1076.05,482 1680.44,1086.39 RTD1.2@1897.28,1086.39
  Bottom Layer (*.GBL) w12: 890.83,2240.17 1216,1915 1216,1837 852,1473 508,1473 452,1417 452,1355 983,824 983,526 1043,466 1080.8,466 1683.8,1069 RTD1.2@1879.89,1069
S1Q1: CCD1.A16 P1.30 | length 5542.7
  Top Layer (*.GTL) w8: v1(1243.5,2442.13) 1244.47,2443.1 1244.47,2452.77 1245,2453.3 1245,2470.7 1244.47,2471.23 1244.47,2544 295,2544 24,2273 24,127 127,24 1508.27,24 CCD1.A16@1720.49,236.22
  Bottom Layer (*.GBL) w8: v1@1243,2442.13 1264.84,2420.28 P1.30@1264.84,2316.93
S1Q2: CCD1.A6 P1.34 | length 4258.8
  Top Layer (*.GTL) w7: 1146,2445 1146,2497
  Top Layer (*.GTL) w8: CCD1.A6@720.49,236.22 720.49,191.49 604,75 162,75 71,166 71,2230 339,2498 1145,2498 1146,2497 ; 1146,2445 1190,2401 v1@1216,2401
  Bottom Layer (*.GBL) w8: v1@1216,2401 1225.47,2391.53 P1.34@1225.47,2316.93
  other v1: 1216,2399
S1Q3: CCD1.D6 P1.2 | length 1345.8
  Top Layer (*.GTL) w8: CCD1.D6@720.49,2236.22 771,2185.71 771,2115 799,2087 1643,2087 1671,2115 1671,2184 1581.12,2273.88 v1(1540,2273.88)
  Bottom Layer (*.GBL) w8: v1(1540,2273.88) 1540,2316.5 P1.2@1540.43,2316.93
S1Q4: CCD1.D16 P1.13 | length 614.3
  Top Layer (*.GTL) w8: v1(1422.32,2461) 1446.32,2437 1470.75,2437 1522.75,2489 1639,2489 1720,2408 v1(1720,2343)
  Bottom Layer (*.GBL) w8: v1(1422.32,2461) P1.13@1422.32,2541.34 ; CCD1.D16@1720,2236.71 v1(1720,2343)
S2Q1: CCD1.B15 P1.33 | length 5351.2
  Top Layer (*.GTL) w8: v1@1225.47,2461 1225.47,2528 311,2528 40,2257 40,138 136,42 1394,42 1622,270 1622,324.87 CCD1.B15@1610.65,336.22
  Bottom Layer (*.GBL) w8: v1@1225.47,2461 P1.33@1225.47,2541.34
  other v1: 1224,2462
S2Q2: CCD1.B7 P1.25 | length 4590.2
  Top Layer (*.GTL) w8: CCD1.B7@820.49,336.22 771,286.73 771,188 641,58 148,58 56,150 56,2243 326,2513 1158.97,2513 1197,2474.97 1197,2429.54 1205.42,2421.13 1264.34,2421.13 1303,2459.79 v1(1303,2461)
  Bottom Layer (*.GBL) w8: v1(1303,2461) 1303,2540.13 P1.25@1304.21,2541.34
S2Q3: CCD1.C7 P1.5 | length 1285.5
  Top Layer (*.GTL) w8: CCD1.C7@820.49,2136.22 852.71,2104 1506,2104 v1(1607,2205)
  Bottom Layer (*.GBL) w8: P1.5@1501.06,2541.34 1501.06,2395.94 1608.06,2395.94 1608.06,2206.06 v1(1607,2205)
S2Q4: CCD1.C15 P1.6 | length 259.5
  Top Layer (*.GTL) w8: CCD1.C15@1620.49,2136.22 CCD1.C15@1620.49,2165.57
  Bottom Layer (*.GBL) w8: P1.6@1501.06,2316.93 1501.06,2278.15 1620.49,2158.72 CCD1.C15@1620.49,2136.22